# EAGLE board tetris_nosound (EAGLE 6.2)

Size 38 x 40.5 mm. Coordinates in mm from the lower left corner, seen from the top.
Outline: 0,0 38,0 38,40.5 0,40.5 0,0
Copper layers (1*16): Top 0.035mm / dielectric 1.5mm / Bottom 0.035mm
Design rules: minimum track width 10mil, minimum drill 24mil, track to track 8mil, track to pad 8mil, pad to pad 8mil, via to via 8mil, smd to smd 8mil, copper to edge 40mil, drill to drill 8mil, minimum pad ring 10mil, minimum via ring 8mil, stop-mask expansion 4mil, vias tented up to drill 0mil, thermal gap 10mil

## Footprints (pad centres in the part's own frame; a part is rotated, then mirrored left to right if it is on the bottom)
DIODE-ZENER = drill 0.9: P$1 -3.556,0; P$2 3.556,0
DO41-10 = drill 1.118 pad 1.93: A 5.08,0; C -5.08,0
AXIAL-0.3 = drill 0.9 pad 1.88: P$1 -3.81,0; P$2 3.81,0
B3F-10XX = drill 1.016 long: 1 -3.251,2.261; 2 3.251,2.261; 3 -3.251,-2.261; 4 3.251,-2.261
SWITCH-SPDT-SMD = smd 1.2 x 2.5: 1 -2.5,-2.75; 2 0,-2.75; 3 2.5,-2.75 | hole 0.9: -3.55,0; 3.55,0
SOT23-5 = smd 0.55 x 1.2: 1 -0.95,-1.3; 2 0,-1.3; 3 0.95,-1.3; 4 0.95,1.3; 5 -0.95,1.3
LD788BS-SS22 = drill 0.7 pad 1.422: A1 -7.5,8.75; A2 -7.5,1.25; A3 -7.5,-3.75; A4 7.5,8.75; A5 7.5,6.25; A6 7.5,1.25; A7 7.5,-6.25; A8 7.5,-8.75; C1 -7.5,6.25; C2 -7.5,3.75; C3 -7.5,-1.25; C4 -7.5,-6.25; C5 -7.5,-8.75; C6 7.5,3.75; C7 7.5,-1.25; C8 7.5,-3.75
DIL20 = drill 0.813 long: 1 -11.43,-3.81; 2 -8.89,-3.81; 3 -6.35,-3.81; 4 -3.81,-3.81; 5 -1.27,-3.81; 6 1.27,-3.81; 7 3.81,-3.81; 8 6.35,-3.81; 9 8.89,-3.81; 10 11.43,-3.81; 11 11.43,3.81; 12 8.89,3.81; 13 6.35,3.81; 14 3.81,3.81; 15 1.27,3.81; 16 -1.27,3.81; 17 -3.81,3.81; 18 -6.35,3.81; 19 -8.89,3.81; 20 -11.43,3.81
NICHICON_10X30 = drill 1.2 pad 2.54 square: P$1 2.75,-1.75 | drill 1.2 pad 2.54: P$2 9.25,-1.75
USB-MICROB = smd 0.4 x 2: D+ 0,3.1; D- -0.65,3.1; GND 1.3,3.1; ID 0.65,3.1; VBUS -1.3,3.1 | smd 1.8 x 1.9: GND@2 -4,0.15; GND@3 4,0.15

## Placement (x,y rotation side)
D2  DIODE-ZENERPTH  [DIODE-ZENER]  5.14,35.56 90 top
D3  DIODE-ZENERPTH  [DIODE-ZENER]  1.14,35.4 90 top
D4  DIODE-ZENERPTH  [DIODE-ZENER]  3.14,35.74 90 top
D5  1N4004  [DO41-10]  16.48,36.99 180 top
R1  [AXIAL-0.3]  15.97,11.74 0 top
S2  [B3F-10XX]  3,15.5 270 top
S3  [B3F-10XX]  3,5 90 top
S4  [B3F-10XX]  32,3.5 180 top
S5  [SWITCH-SPDT-SMD]  1.93,25.12 90 top
U1  V_REG_LDOSMD  [SOT23-5]  3.41,25.74 0 bottom
U$1  LD788BS-SS22  [LD788BS-SS22]  16.5,10 0 top
U$2  LD788BS-SS22  [LD788BS-SS22]  16.5,30 0 top
U$3  TINY2313-*P*  [DIL20]  16.33,20.96 90 top
U$5  NICHICON_12F  [NICHICON_10X30]  27.1,10.31 0 top
X1  USB-MICROB  [USB-MICROB]  16.05,1.51 0 bottom

## Library data of the parts
D2-D4 R1 S5 U1 X1 = SparkFun
D5 = adafruit
S2-S4 = switch-omron; MPN: B3F-1000; OC_FARNELL: 176432; OC_NEWARK: 36M3542
U$1 U$2 U$5 = mrule
U$3 = avr-6

## Nets
N$1: U$1.A4 U$2.C1 U$3.13
N$2: U$1.A5 U$2.C2 U$3.14
N$3: U$1.C6 U$2.A2 U$3.15
N$4: U$1.A6 U$2.C3 U$3.16
N$5: U$1.C7 U$2.A3 U$3.17
N$6: U$1.A7 U$2.C4 U$3.19
N$7: U$1.A8 U$2.C5 U$3.5
N$8: U$1.C8 U$2.A1 U$3.18
N$9: D5.C R1.P$1 U$5.P$2
N$10: U$1.C2 U$2.A5 U$3.3
N$11: D2.P$2 U$1.A2 U$2.C6 U$3.6
N$12: D3.P$2 U$1.C3 U$2.A6 U$3.7
N$13: D4.P$2 U$1.A3 U$2.C7 U$3.8
N$14: U$1.A1 U$2.C8 U$3.9
N$15: U$1.C4 U$2.A7 U$3.11
N$16: U$1.C5 U$2.A8 U$3.12
N$18: D5.A U$3.10
N$19: S5.1 U1.5 U$5.P$1
N$21: D2.P$1 S2.3 S2.4
N$22: D3.P$1 S3.3 S3.4
N$23: D4.P$1 S4.3 S4.4
N$24: R1.P$2 U1.2 X1.GND
N$25: U1.1 X1.D+ X1.D- X1.VBUS
N$26: S5.2 U$3.20
N$27: S2.1 S2.2 S3.1 S3.2 S4.1 S4.2 U$1.C1 U$2.A4

## Tracks (layer width: path | path; a pad name or v marks a point on that pad's centre or on a via)
N$1  (2 unrouted)
N$2  (2 unrouted)
N$3  (2 unrouted)
N$4  (2 unrouted)
N$5  (2 unrouted)
N$6  (2 unrouted)
N$7  (2 unrouted)
N$8  (2 unrouted)
N$9  (2 unrouted)
N$10  (2 unrouted)
N$11  (3 unrouted)
N$12  (3 unrouted)
N$13  (3 unrouted)
N$14  (2 unrouted)
N$15  (2 unrouted)
N$16  (2 unrouted)
N$18  (1 unrouted)
N$19  (2 unrouted)
N$21  (2 unrouted)
N$22  (2 unrouted)
N$23  (2 unrouted)
N$24  (2 unrouted)
N$25  (3 unrouted)
N$26  (1 unrouted)
N$27  (7 unrouted)